# Altium PCB Accelero.PcbDoc
Units mm, origin at the board's own origin, x right, y up, seen from the top; angles counter-clockwise.
Board outline 51.18 x 81.28 mm, 2 copper layers (Top Layer, Bottom Layer); 58 components, 25 nets, 136 pads, 101 vias.
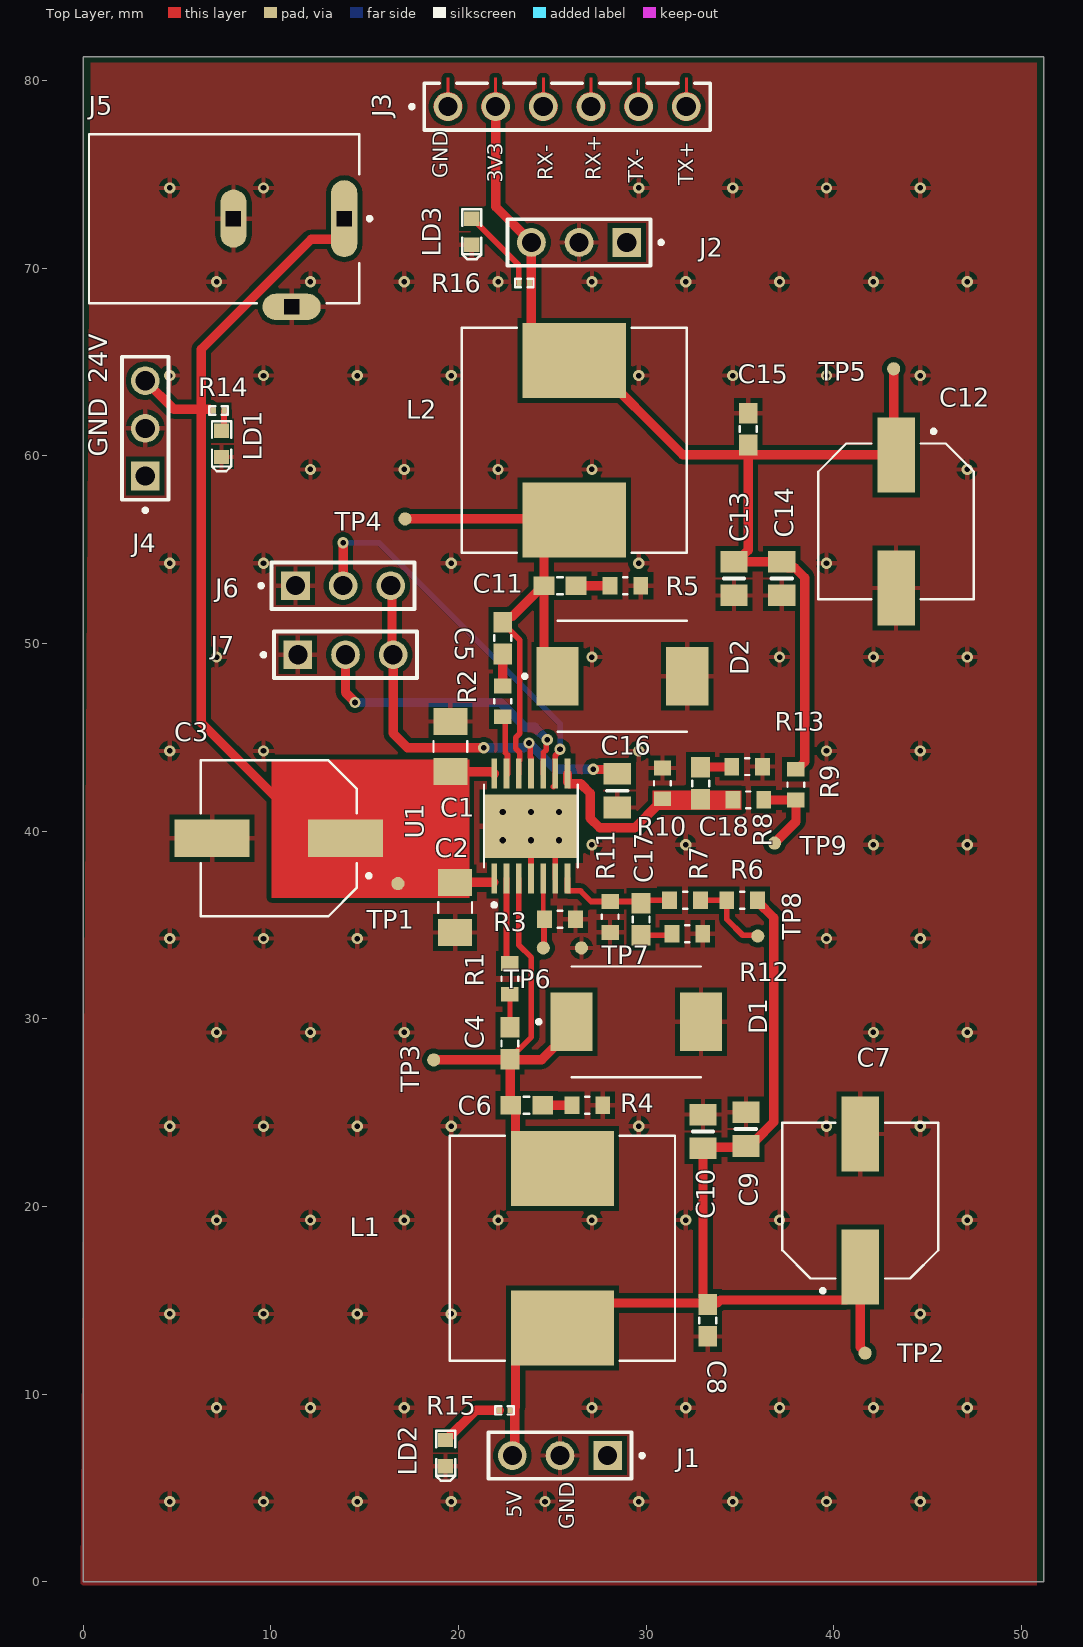
[diagram p0: Top Layer view]
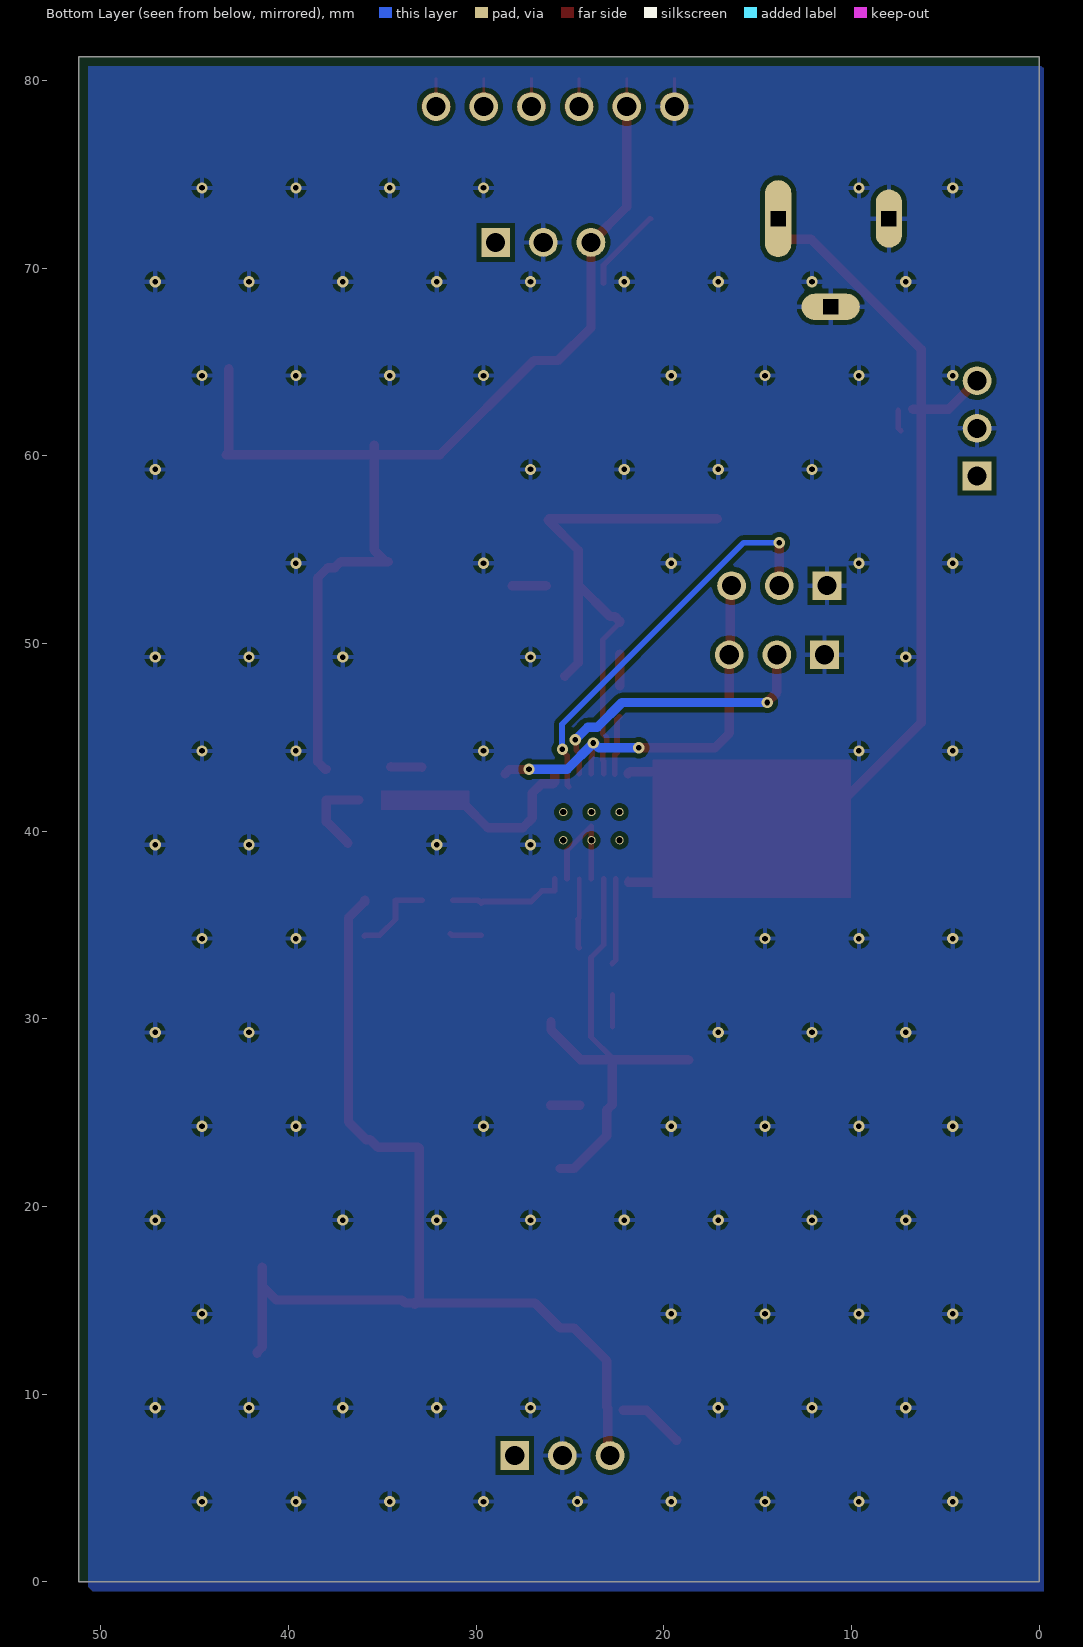
[diagram p1: Bottom Layer view, seen from below]
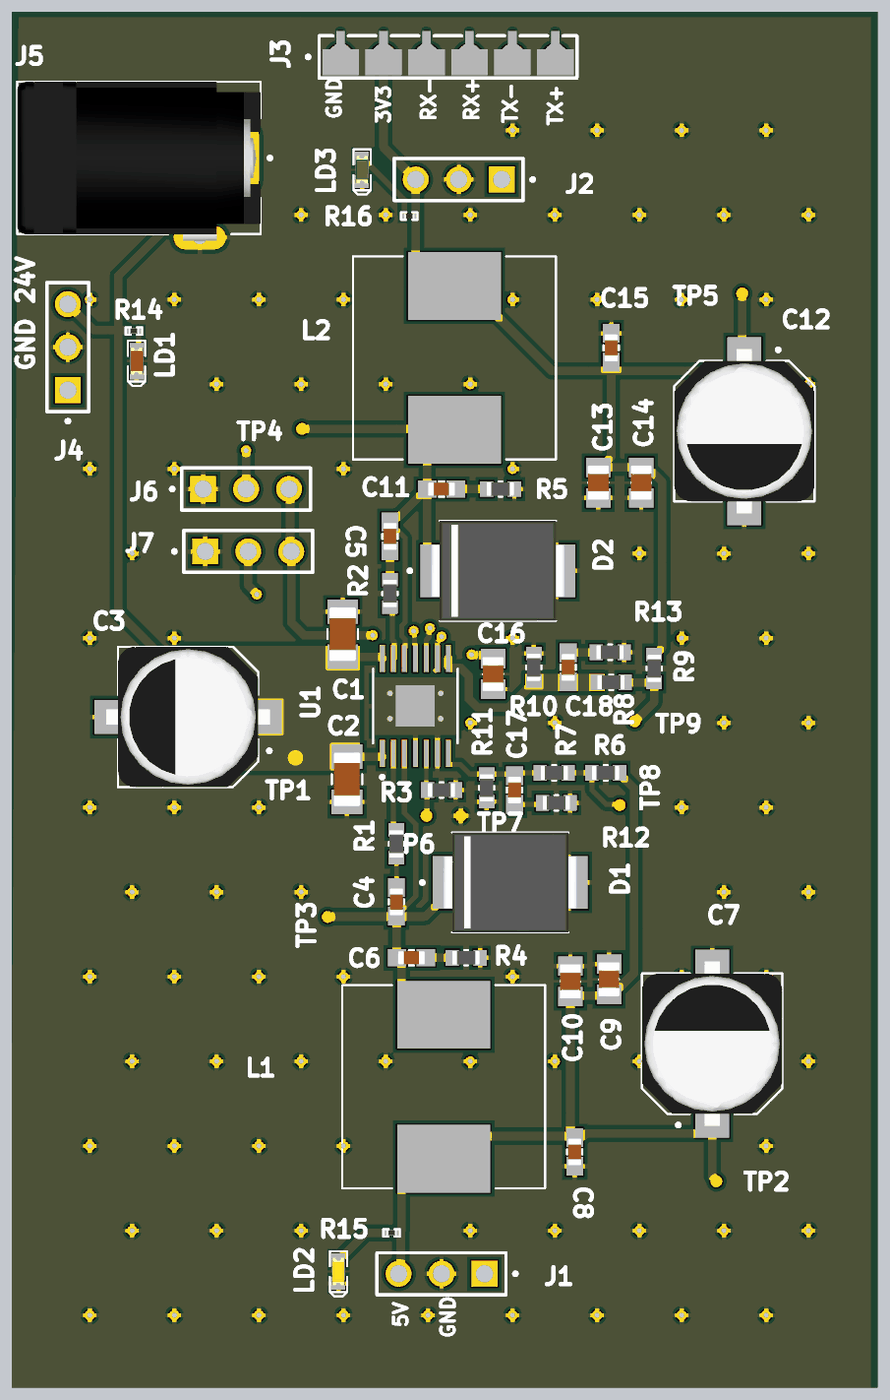
[diagram p2: 3D render of the assembled board from above, using the file's embedded part models]

## Layer stack, top to bottom
Top Solder: solder mask 0.0102, Solder Resist, Dk 3.5
Top Layer: signal copper 0.0356
Dielectric 1: dielectric 0.32, FR-4, Dk 4.8
Bottom Layer: signal copper 0.0356
Bottom Solder: solder mask 0.0102, Solder Resist, Dk 3.5

## Board outline
0,0 51.181,0 51.181,81.28 0,81.28

## Design rules (kind name [scope] priority, off if disabled: settings)
Clearance [All] p1: gap=0.254 ignorepadtopadclearanceinfootprint=FALSE
HoleSize [All] p1: absolutevalues=TRUE maxlimit=0.3 minlimit=0.2 maxpercent=80.000 minpercent=20.000
HoleToHoleClearance [All] p1: gap=0.25 allowstackedmicrovias=TRUE
PolygonConnect [All] p1: connectstyle=Relief reliefconductorwidth=0.254 reliefentries=4 polygonreliefangle="90 Angle" airgapwidth=0.254
RoutingVias [All] p1: holewidth=0.3 width=0.6 viastyle="Through Hole" minholewidth=0.3 minwidth=0.6 maxholewidth=0.3 maxwidth=0.6
SilkToSolderMaskClearance [IsPad] p1: minsilkscreentomaskgap=0.1 clearancetoexposedcopper=TRUE
SolderMaskExpansion [All] p1: expansion=0.102 istentingtop=FALSE
Width [All] p1: maxlimit=0.5 minlimit=0.3 preferedwidth=0.3
27 further rules are at their usual default settings.

## Components (designator, comment, footprint, x,y, rotation, side; value= is the part's Value field where it differs from the comment)
C1 "10 UF" CAPC3216X180N 19.558,44.516 r270 top
C2 "10 UF" CAPC3216X180N 19.812,35.941 r90 top
C3 "100UF" CAP_EEEFC1E101P 10.414,39.624 r180 top
C4 "0.033uF" CAPC1608X90 22.733,28.702 r270 top
C5 "0.033uF" CAPC1608X90 22.352,50.292 r270 top
C6 "470 PF" CAPC1608X90 23.622,25.4 r0 top
C7 "100UF" CAP_EEEFC1E101P 41.402,20.32 r90 top
C8 "0.1UF" CAPC1608X90 33.274,13.931 r270 top
C9 "10UF" CAPC2012X140N 35.306,24.13 r90 top
C10 "10UF" CAPC2012X140N 33.02,24.003 r90 top
C11 "470 PF" CAPC1608X90 25.4,53.086 r0 top
C12 "100UF" CAP_EEEFC1E101P 43.307,56.509 r270 top
C13 "10UF" CAPC2012X140N 34.671,53.467 r270 top
C14 "10UF" CAPC2012X140N 37.211,53.467 r270 top
C15 "0.1UF" CAPC1608X90 35.433,61.429 r90 top
C16 "4.7UF" CAPC2012X140N 28.448,42.164 r270 top
C17 "10NF" CAPC1608X90 29.718,35.306 r270 top
C18 "6.8NF" CAPC1608X90 32.893,42.556 r90 top
D1 "Schottky Diode" DIOM7959X261N 29.464,29.845 r0 top
D2 "Schottky Diode" DIOM7959X261N 28.728,48.26 r0 top
J1 "Header 3" SAMTEC_HMTSW-103-XX-X-S-XXX 25.4,6.731 r0 top
J2 "Header 3" SAMTEC_HMTSW-103-XX-X-S-XXX 26.416,71.374 r0 top
J3 "Header 6" SAMTEC_MTLW-106-06-G-S-180 25.781,78.613 r180 top
J4 "Header 3" SAMTEC_HMTSW-103-XX-X-S-XXX 3.302,61.468 r270 top
J5 "Header 2" TENSILITY_54-00129 8.001,72.644 r270 top
J6 "Header 3" SAMTEC_HMTSW-103-XX-X-S-XXX 13.843,53.086 r180 top
J7 "Header 3" SAMTEC_HMTSW-103-XX-X-S-XXX 13.97,49.403 r180 top
L1 "22UH" IND_MSS1278-223MLB 25.527,17.78 r90 top
L2 "22UH" IND_MSS1278-223MLB 26.162,60.833 r90 top
LD1 "L0603R" LED_0603_R 7.366,60.643 r90 top
LD2 "L0603A" LED_0603_Y 19.304,6.858 r90 top
LD3 "L0603G" LED_0603_G 20.701,71.945 r90 top
R1 "0 ohms" RESC1608X55N 22.733,32.131 r90 top
R2 "0 ohms" RESC1608X55N 22.352,46.921 r90 top
R3 "0 ohms" RESC1608X55N 25.4,35.306 r180 top
R4 "10R" RESC1608X55N 26.855,25.4 r180 top
R5 "10R" RESC1608X55N 28.887,53.086 r180 top
R6 "51R" RESC1608X55N 35.11,36.322 r0 top
R7 "20K" RESC1608X55N 32.062,36.322 r0 top
R8 "20K" RESC1608X55N 35.433,41.667 r180 top
R9 "51R" RESC1608X55N 37.973,42.487 r270 top
R10 "6.34K" RESC1608X55N 30.861,42.556 r270 top
R11 "3.83R" RESC1608X55N 28.067,35.433 r90 top
R12 "845R" RESC1608X55N 32.189,34.544 r180 top
R13 "1.21K" RESC1608X55N 35.375,43.445 r180 top
R14 "10K" RESC0603X03L_C 7.208,62.421 r0 top value=1k
R15 "1k" RESC0603X03L_C 22.448,9.144 r180 top
R16 "330R" RESC0603X03L_C 23.495,69.215 r180 top value=1k
TP1 "Ø0.7mm,SMD" TP_SMD_D0.7mm 16.764,37.211 r90 top
TP2 "Ø0.7mm,SMD" TP_SMD_D0.7mm 41.656,12.192 r90 top
TP3 "Ø0.7mm,SMD" TP_SMD_D0.7mm 18.669,27.813 r90 top
TP4 "Ø0.7mm,SMD" TP_SMD_D0.7mm 17.145,56.642 r90 top
TP5 "Ø0.7mm,SMD" TP_SMD_D0.7mm 43.18,64.643 r90 top
TP6 "Ø0.7mm,SMD" TP_SMD_D0.7mm 24.511,33.782 r90 top
TP7 "Ø0.7mm,SMD" TP_SMD_D0.7mm 26.543,33.782 r90 top
TP8 "Ø0.7mm,SMD" TP_SMD_D0.7mm 35.941,34.417 r90 top
TP9 "Ø0.7mm,SMD" TP_SMD_D0.7mm 36.83,39.37 r90 top
U1 "TPS54383PWPR" IC_TPS27S100BPWPR 23.852,40.271 r90 top

## Footprints (in the part's own frame and the unit in brackets; to place one, negate y for a bottom-side part, rotate by r counter-clockwise, add the part's x,y. Pads: shape width x height; smd on the part's side, far side on the other; paste and mask are expansions set on the pad)
CAP_EEEFC1E101P [mm]
  rect 4x2 smd: 1(-3.55,0) 2(3.55,0)
  silkscreen extent -4.9,-4.15 4.15,4.15, body extent -4.85,-4.15 4.85,4.15, height 10.2
CAPC1608X90 [mm]
  rect 1.1x1 smd: 1(-0.85,0) 2(0.85,0)
  silkscreen extent -0.15,-0.45 0.15,0.45, body extent -0.8,-0.4 0.8,0.4, height 0.95
CAPC2012X140N [mm]
  rect 1.15x1.45 smd paste+0 mask+0.102: 1(-0.9,0) 2(0.9,0)
  silkscreen extent 0,-0.55 0,0.55, body extent -1,-0.63 1,0.63, height 1.4
CAPC3216X180N [mm]
  rect 1.44x1.82 smd: 1(-1.336,0) 2(1.336,0)
  silkscreen extent -0.29,-0.9 0.29,0.9, body extent -1.6,-0.8 1.6,0.8, height 1.8
DIOM7959X261N [mm]
  rect 2.25x3.12 smd: A(3.455,0) C(-3.455,0)
  silkscreen extent -5.3,-2.95 3.44,2.95, body extent -3.98,-2.95 3.98,2.95, height 2.62
IC_TPS27S100BPWPR [mm]
  rect 1.6x0.3 smd paste-0.025: 1(-2.8,1.95) 2(-2.8,1.3) 3(-2.8,0.65) 4(-2.8,0) 5(-2.8,-0.65) 6(-2.8,-1.3) 7(-2.8,-1.95) 8(2.8,-1.95) 9(2.8,-1.3) 10(2.8,-0.65) 11(2.8,0) 12(2.8,0.65) 13(2.8,1.3) 14(2.8,1.95)
  rect 3.4x5 smd paste-3 mask+0: 15(0,0)
  round 0.44 hole 0.33 mask+0: 16(-0.75,1.5) 17(0.75,1.5) 20(-0.75,-1.5) 21(0.75,-1.5)
  round 0.44 hole 0.33: 18(-0.75,0) 19(0.75,0)
  silkscreen extent -4.3,-2.5 2.2,2.5
IND_MSS1278-223MLB [mm]
  rect 4x5.5 smd: 1(-4.25,0) 2(4.25,0)
  silkscreen extent -6,-6 6,6
LED_0603_G [mil]
  rect 30x32 smd: 1(-27.5,0) 2(27.5,0)
  silkscreen extent -58,-20 48,20, body extent -32,-16 32,16, height 24
LED_0603_R [mil]
  rect 30x32 smd: 1(-27.5,0) 2(27.5,0)
  silkscreen extent -58,-20 47,20, body extent -32,-16 32,16, height 24
LED_0603_Y [mil]
  rect 30x32 smd: 1(-27.5,0) 2(27.5,0)
  silkscreen extent -58,-20 47,20, body extent -32,-16 32,16, height 24
RESC0603X03L_C [mm]
  rect 0.27x0.3 smd: 1(-0.285,0) 2(0.285,0)
  silkscreen extent -0.49,-0.22 0.49,0.22, body extent -0.3,-0.15 0.3,0.15, height 0.23
RESC1608X55N [mm]
  rect 0.79x0.93 smd: 1(-0.82,0) 2(0.82,0)
  silkscreen extent -0.11,-0.45 0.11,0.45, body extent -0.8,-0.4 0.8,0.4, height 0.55
SAMTEC_HMTSW-103-XX-X-S-XXX [mm]
  rect 1.53x1.53 / inner round 1.53 / far side rect 1.53x1.53 hole 1.02: 01(2.54,0)
  round 1.53 hole 1.02: 02(0,0) 03(-2.54,0)
  silkscreen extent -3.81,-1.24 4.47,1.24
SAMTEC_MTLW-106-06-G-S-180 [mm]
  round 1.52 hole 1.02: 01(6.35,0) 02(3.81,0) 03(1.27,0) 04(-1.27,0) 05(-3.81,0) 06(-6.35,0)
  Top Layer region: 6.429,0.756 6.508,0.743 6.585,0.723 6.659,0.694 6.73,0.658 6.797,0.615 6.859,0.565 6.915,0.509 6.965,0.447 7.008,0.38 7.044,0.309 7.073,0.235 7.093,0.158 7.106,0.079 7.11,0 7.109,-0.038 7.106,-0.076 7.102,-0.113 7.095,-0.151 7.087,-0.187 7.077,-0.224 7.065,-0.259 7.051,-0.294 7.036,-0.329 7.019,-0.363 7,-0.395 6.98,-0.427 6.958,-0.458 6.935,-0.487 6.91,-0.516 6.884,-0.543 6.856,-0.569 6.827,-0.593 6.798,-0.616 6.767,-0.638 6.735,-0.658 6.702,-0.676 6.668,-0.692 6.633,-0.707 6.598,-0.721 6.562,-0.732 6.526,-0.742 6.489,-0.75 6.452,-0.756 6.415,-0.76 6.415,-1.53 6.285,-1.53 6.285,-0.76 6.248,-0.756 6.211,-0.75 6.174,-0.742 6.138,-0.732 6.102,-0.721 6.067,-0.707 6.032,-0.692 5.998,-0.676 5.965,-0.658 5.933,-0.638 5.902,-0.616 5.873,-0.593 5.844,-0.569 5.816,-0.543 5.79,-0.516 5.765,-0.487 5.742,-0.458 5.72,-0.427 5.7,-0.395 5.681,-0.363 5.664,-0.329 5.649,-0.294 5.635,-0.259 5.623,-0.224 5.613,-0.187 5.605,-0.151 5.598,-0.113 5.594,-0.076 5.591,-0.038 5.59,0 5.594,0.079 5.607,0.158 5.627,0.235 5.656,0.309 5.692,0.38 5.735,0.447 5.785,0.509 5.841,0.565 5.903,0.615 5.97,0.658 6.041,0.694 6.115,0.723 6.192,0.743 6.271,0.756 6.35,0.76
  Top Layer region: 3.889,0.756 3.968,0.743 4.045,0.723 4.119,0.694 4.19,0.658 4.257,0.615 4.319,0.565 4.375,0.509 4.425,0.447 4.468,0.38 4.504,0.309 4.533,0.235 4.553,0.158 4.566,0.079 4.57,0 4.569,-0.038 4.566,-0.076 4.562,-0.113 4.555,-0.151 4.547,-0.187 4.537,-0.224 4.525,-0.259 4.511,-0.294 4.496,-0.329 4.479,-0.363 4.46,-0.395 4.44,-0.427 4.418,-0.458 4.395,-0.487 4.37,-0.516 4.344,-0.543 4.316,-0.569 4.287,-0.593 4.258,-0.616 4.227,-0.638 4.195,-0.658 4.162,-0.676 4.128,-0.692 4.093,-0.707 4.058,-0.721 4.022,-0.732 3.986,-0.742 3.949,-0.75 3.912,-0.756 3.875,-0.76 3.875,-1.53 3.745,-1.53 3.745,-0.76 3.708,-0.756 3.671,-0.75 3.634,-0.742 3.598,-0.732 3.562,-0.721 3.527,-0.707 3.492,-0.692 3.458,-0.676 3.425,-0.658 3.393,-0.638 3.362,-0.616 3.333,-0.593 3.304,-0.569 3.276,-0.543 3.25,-0.516 3.225,-0.487 3.202,-0.458 3.18,-0.427 3.16,-0.395 3.141,-0.363 3.124,-0.329 3.109,-0.294 3.095,-0.259 3.083,-0.224 3.073,-0.187 3.065,-0.151 3.058,-0.113 3.054,-0.076 3.051,-0.038 3.05,0 3.054,0.079 3.067,0.158 3.087,0.235 3.116,0.309 3.152,0.38 3.195,0.447 3.245,0.509 3.301,0.565 3.363,0.615 3.43,0.658 3.501,0.694 3.575,0.723 3.652,0.743 3.731,0.756 3.81,0.76
  Top Layer region: 1.349,0.756 1.428,0.743 1.505,0.723 1.579,0.694 1.65,0.658 1.717,0.615 1.779,0.565 1.835,0.509 1.885,0.447 1.928,0.38 1.964,0.309 1.993,0.235 2.013,0.158 2.026,0.079 2.03,0 2.029,-0.038 2.026,-0.076 2.022,-0.113 2.015,-0.151 2.007,-0.187 1.997,-0.224 1.985,-0.259 1.971,-0.294 1.956,-0.329 1.939,-0.363 1.92,-0.395 1.9,-0.427 1.878,-0.458 1.855,-0.487 1.83,-0.516 1.804,-0.543 1.776,-0.569 1.747,-0.593 1.718,-0.616 1.687,-0.638 1.655,-0.658 1.622,-0.676 1.588,-0.692 1.553,-0.707 1.518,-0.721 1.482,-0.732 1.446,-0.742 1.409,-0.75 1.372,-0.756 1.335,-0.76 1.335,-1.53 1.205,-1.53 1.205,-0.76 1.168,-0.756 1.131,-0.75 1.094,-0.742 1.058,-0.732 1.022,-0.721 0.987,-0.707 0.952,-0.692 0.918,-0.676 0.885,-0.658 0.853,-0.638 0.822,-0.616 0.793,-0.593 0.764,-0.569 0.736,-0.543 0.71,-0.516 0.685,-0.487 0.662,-0.458 0.64,-0.427 0.62,-0.395 0.601,-0.363 0.584,-0.329 0.569,-0.294 0.555,-0.259 0.543,-0.224 0.533,-0.187 0.525,-0.151 0.518,-0.113 0.514,-0.076 0.511,-0.038 0.51,0 0.514,0.079 0.527,0.158 0.547,0.235 0.576,0.309 0.612,0.38 0.655,0.447 0.705,0.509 0.761,0.565 0.823,0.615 0.89,0.658 0.961,0.694 1.035,0.723 1.112,0.743 1.191,0.756 1.27,0.76
  Top Layer region: -1.191,0.756 -1.112,0.743 -1.035,0.723 -0.961,0.694 -0.89,0.658 -0.823,0.615 -0.761,0.565 -0.705,0.509 -0.655,0.447 -0.612,0.38 -0.576,0.309 -0.547,0.235 -0.527,0.158 -0.514,0.079 -0.51,0 -0.511,-0.038 -0.514,-0.076 -0.518,-0.113 -0.525,-0.151 -0.533,-0.187 -0.543,-0.224 -0.555,-0.259 -0.569,-0.294 -0.584,-0.329 -0.601,-0.363 -0.62,-0.395 -0.64,-0.427 -0.662,-0.458 -0.685,-0.487 -0.71,-0.516 -0.736,-0.543 -0.764,-0.569 -0.793,-0.593 -0.822,-0.616 -0.853,-0.638 -0.885,-0.658 -0.918,-0.676 -0.952,-0.692 -0.987,-0.707 -1.022,-0.721 -1.058,-0.732 -1.094,-0.742 -1.131,-0.75 -1.168,-0.756 -1.205,-0.76 -1.205,-1.53 -1.335,-1.53 -1.335,-0.76 -1.372,-0.756 -1.409,-0.75 -1.446,-0.742 -1.482,-0.732 -1.518,-0.721 -1.553,-0.707 -1.588,-0.692 -1.622,-0.676 -1.655,-0.658 -1.687,-0.638 -1.718,-0.616 -1.747,-0.593 -1.776,-0.569 -1.804,-0.543 -1.83,-0.516 -1.855,-0.487 -1.878,-0.458 -1.9,-0.427 -1.92,-0.395 -1.939,-0.363 -1.956,-0.329 -1.971,-0.294 -1.985,-0.259 -1.997,-0.224 -2.007,-0.187 -2.015,-0.151 -2.022,-0.113 -2.026,-0.076 -2.029,-0.038 -2.03,0 -2.026,0.079 -2.013,0.158 -1.993,0.235 -1.964,0.309 -1.928,0.38 -1.885,0.447 -1.835,0.509 -1.779,0.565 -1.717,0.615 -1.65,0.658 -1.579,0.694 -1.505,0.723 -1.428,0.743 -1.349,0.756 -1.27,0.76
  Top Layer region: -3.731,0.756 -3.652,0.743 -3.575,0.723 -3.501,0.694 -3.43,0.658 -3.363,0.615 -3.301,0.565 -3.245,0.509 -3.195,0.447 -3.152,0.38 -3.116,0.309 -3.087,0.235 -3.067,0.158 -3.054,0.079 -3.05,0 -3.051,-0.038 -3.054,-0.076 -3.058,-0.113 -3.065,-0.151 -3.073,-0.187 -3.083,-0.224 -3.095,-0.259 -3.109,-0.294 -3.124,-0.329 -3.141,-0.363 -3.16,-0.395 -3.18,-0.427 -3.202,-0.458 -3.225,-0.487 -3.25,-0.516 -3.276,-0.543 -3.304,-0.569 -3.333,-0.593 -3.362,-0.616 -3.393,-0.638 -3.425,-0.658 -3.458,-0.676 -3.492,-0.692 -3.527,-0.707 -3.562,-0.721 -3.598,-0.732 -3.634,-0.742 -3.671,-0.75 -3.708,-0.756 -3.745,-0.76 -3.745,-1.53 -3.875,-1.53 -3.875,-0.76 -3.912,-0.756 -3.949,-0.75 -3.986,-0.742 -4.022,-0.732 -4.058,-0.721 -4.093,-0.707 -4.128,-0.692 -4.162,-0.676 -4.195,-0.658 -4.227,-0.638 -4.258,-0.616 -4.287,-0.593 -4.316,-0.569 -4.344,-0.543 -4.37,-0.516 -4.395,-0.487 -4.418,-0.458 -4.44,-0.427 -4.46,-0.395 -4.479,-0.363 -4.496,-0.329 -4.511,-0.294 -4.525,-0.259 -4.537,-0.224 -4.547,-0.187 -4.555,-0.151 -4.562,-0.113 -4.566,-0.076 -4.569,-0.038 -4.57,0 -4.566,0.079 -4.553,0.158 -4.533,0.235 -4.504,0.309 -4.468,0.38 -4.425,0.447 -4.375,0.509 -4.319,0.565 -4.257,0.615 -4.19,0.658 -4.119,0.694 -4.045,0.723 -3.968,0.743 -3.889,0.756 -3.81,0.76
  Top Layer region: -6.271,0.756 -6.192,0.743 -6.115,0.723 -6.041,0.694 -5.97,0.658 -5.903,0.615 -5.841,0.565 -5.785,0.509 -5.735,0.447 -5.692,0.38 -5.656,0.309 -5.627,0.235 -5.607,0.158 -5.594,0.079 -5.59,0 -5.591,-0.038 -5.594,-0.076 -5.598,-0.113 -5.605,-0.151 -5.613,-0.187 -5.623,-0.224 -5.635,-0.259 -5.649,-0.294 -5.664,-0.329 -5.681,-0.363 -5.7,-0.395 -5.72,-0.427 -5.742,-0.458 -5.765,-0.487 -5.79,-0.516 -5.816,-0.543 -5.844,-0.569 -5.873,-0.593 -5.902,-0.616 -5.933,-0.638 -5.965,-0.658 -5.998,-0.676 -6.032,-0.692 -6.067,-0.707 -6.102,-0.721 -6.138,-0.732 -6.174,-0.742 -6.211,-0.75 -6.248,-0.756 -6.285,-0.76 -6.285,-1.53 -6.415,-1.53 -6.415,-0.76 -6.452,-0.756 -6.489,-0.75 -6.526,-0.742 -6.562,-0.732 -6.598,-0.721 -6.633,-0.707 -6.668,-0.692 -6.702,-0.676 -6.735,-0.658 -6.767,-0.638 -6.798,-0.616 -6.827,-0.593 -6.856,-0.569 -6.884,-0.543 -6.91,-0.516 -6.935,-0.487 -6.958,-0.458 -6.98,-0.427 -7,-0.395 -7.019,-0.363 -7.036,-0.329 -7.051,-0.294 -7.065,-0.259 -7.077,-0.224 -7.087,-0.187 -7.095,-0.151 -7.102,-0.113 -7.106,-0.076 -7.109,-0.038 -7.11,0 -7.106,0.079 -7.093,0.158 -7.073,0.235 -7.044,0.309 -7.008,0.38 -6.965,0.447 -6.915,0.509 -6.859,0.565 -6.797,0.615 -6.73,0.658 -6.659,0.694 -6.585,0.723 -6.508,0.743 -6.429,0.756 -6.35,0.76
  silkscreen extent -7.62,-1.24 8.37,1.24
TENSILITY_54-00129 [mm]
  oval 4.1x1.4 hole 0.8 square mask+0.05: A(0,5.9)
  oval 3.1x1.4 hole 0.8 square mask+0.05: B(0,0)
  oval 1.4x3.1 hole 0.8 square mask+0.05: C(4.7,3.1)
  silkscreen extent -4.5,-7.7 4.5,7.35, body extent -4.5,-7.7 4.88,6.7, height 10.8
TP_SMD_D0.7mm [mm]
  round 0.7 smd paste-5: 1(0,0)

## Part data
C1 C2: library part C3216X5R1E106M160AB, "CAP CER 10UF 16V X5R 1206", Package="3216 TDK", Check_prices=https://www.snapeda.com/parts/C3216X5R1E106M160AB/TDK/view-part/?ref=eda, Digi-Key_Part_Number=445-7708-2-ND, MF=TDK, MP=C3216X5R1E106M160AB, Purchase-URL=https://pricing.snapeda.com/search/part/C3216X5R1E106M160AB/?ref=eda, SnapEDA_Link=https://www.snapeda.com/parts/C3216X5R1E106M160AB/TDK/view-part/?ref=snap
C3: library part EEEFC1E101P, "Capacitor, aluminum, 25 V, ±20%, 100 μF, 0.328 x 0.390 / inch", Package="RADIAL-2 Panasonic", Check_prices=https://www.snapeda.com/parts/EEE-FC1E101P/Panasonic+Electronic+Components/view-part/?ref=eda, MF=Panasonic, MP=EEE-FC1E101P, SnapEDA_Link=https://www.snapeda.com/parts/EEE-FC1E101P/Panasonic+Electronic+Components/view-part/?ref=snap
C4 C5: library part C0603C104J3RACTU, "Capacitor, ceramic, 25 V, X7R, 20%, .033 μF, 0603", Package="603-2 KEMET", Check_prices=https://www.snapeda.com/parts/C0603C104J3RACTU/KEMET/view-part/?ref=eda, MF=KEMET, MP=C0603C104J3RACTU, SnapEDA_Link=https://www.snapeda.com/parts/C0603C104J3RACTU/KEMET/view-part/?ref=snap
C6 C11: library part C0603C104J3RACTU, "Capacitor, ceramic, 25 V, X7R, 20%, 470 pF, 0603", Package="603-2 KEMET", Check_prices=https://www.snapeda.com/parts/C0603C104J3RACTU/KEMET/view-part/?ref=eda, MF=KEMET, MP=C0603C104J3RACTU, SnapEDA_Link=https://www.snapeda.com/parts/C0603C104J3RACTU/KEMET/view-part/?ref=snap
C7 C12: library part EEEFC1E101P, "Capacitor, aluminum, 10 V, 20%, FC series, 100 μF, / 0.335 x 0.374", Package="RADIAL-2 Panasonic", Check_prices=https://www.snapeda.com/parts/EEE-FC1E101P/Panasonic+Electronic+Components/view-part/?ref=eda, MF=Panasonic, MP=EEE-FC1E101P, SnapEDA_Link=https://www.snapeda.com/parts/EEE-FC1E101P/Panasonic+Electronic+Components/view-part/?ref=snap
C8 C15: library part C0603C104J3RACTU, "Capacitor, ceramic, 10 V, X7R, 20%, 0.1 μF, 0603", Package="603-2 KEMET", Check_prices=https://www.snapeda.com/parts/C0603C104J3RACTU/KEMET/view-part/?ref=eda, MF=KEMET, MP=C0603C104J3RACTU, SnapEDA_Link=https://www.snapeda.com/parts/C0603C104J3RACTU/KEMET/view-part/?ref=snap
C9 C10 C13 C14: library part 0805ZD474MAT2A, "Capacitor, ceramic, 6.3 V, X5R, 20%, 10 μF, 0805", Package="0805-2 AVX", Check_prices=https://www.snapeda.com/parts/0805ZD474MAT2A/AVX/view-part/?ref=eda, MF=AVX, MP=0805ZD474MAT2A, SnapEDA_Link=https://www.snapeda.com/parts/0805ZD474MAT2A/AVX/view-part/?ref=snap
C16: library part 0805ZD474MAT2A, "Capacitor, ceramic, 10 V, X5R, 20%, 4.7 μF, 0805", Package="0805-2 AVX", Check_prices=https://www.snapeda.com/parts/0805ZD474MAT2A/AVX/view-part/?ref=eda, MF=AVX, MP=0805ZD474MAT2A, SnapEDA_Link=https://www.snapeda.com/parts/0805ZD474MAT2A/AVX/view-part/?ref=snap
C17: library part C0603C104J3RACTU, "Capacitor, ceramic, 25 V, X7R, 20%, 10 nF, 0603", Package="603-2 KEMET", Check_prices=https://www.snapeda.com/parts/C0603C104J3RACTU/KEMET/view-part/?ref=eda, MF=KEMET, MP=C0603C104J3RACTU, SnapEDA_Link=https://www.snapeda.com/parts/C0603C104J3RACTU/KEMET/view-part/?ref=snap
C18: library part C0603C104J3RACTU, "Capacitor, ceramic, 25 V, X7R, 20%, 6.8 nF, 0603", Package="603-2 KEMET", Check_prices=https://www.snapeda.com/parts/C0603C104J3RACTU/KEMET/view-part/?ref=eda, MF=KEMET, MP=C0603C104J3RACTU, SnapEDA_Link=https://www.snapeda.com/parts/C0603C104J3RACTU/KEMET/view-part/?ref=snap
D1 D2: library part MBRS330T3G, "Diode Schottky 30 V 3A Surface Mount SMC", Package="SMC-2 ON Semiconductor", Check_prices=https://www.snapeda.com/parts/MBRS330T3G/Onsemi/view-part/?ref=eda, MF="ON Semiconductor", MP=MBRS330T3G, SnapEDA_Link=https://www.snapeda.com/parts/MBRS330T3G/Onsemi/view-part/?ref=snap
J1 J2 J4 J6 J7: library part HMTSW-103-XX-X-S-XXX, "Connector Unshrouded Header 3 Position 2.54mm Solder Straight Through Hole", Package=None, Check_prices=https://www.snapeda.com/parts/HMTSW-103-10-T-S-330/Samtec/view-part/?ref=eda, MF=Samtec, MP=HMTSW-103-10-T-S-330, SnapEDA_Link=https://www.snapeda.com/parts/HMTSW-103-10-T-S-330/Samtec/view-part/?ref=snap
J3: library part MTLW-106-06-G-S-180, Package=None, Availability=Unavailable, MP=MTLW-106-06-G-S-180, Price=None
J5: library part 54-00129, "Connector, dc jack 5.5x2.1 mm, PCB mount, 90 degrees, silver plated, thru hole", Package=None, Availability="In Stock", Check_prices=https://www.snapeda.com/parts/54-00129/Tensility+International+Corp/view-part/?ref=eda, MF="Tensility International Corp", MP=54-00129, Price=None, Purchase-URL=https://pricing.snapeda.com/search?q=54-00129&ref=eda, SnapEDA_Link=https://www.snapeda.com/parts/54-00129/Tensility+International+Corp/view-part/?ref=snap
L1 L2: library part MSS1278-223MLB, "Inductor, Power, 6.8 A, 0.038 Ω, 22 μH, 0.484 x 0.484 / inch", Package=None, Check_prices=https://www.snapeda.com/parts/MSS1278-223MLB/Coilcraft/view-part/?ref=eda, MF=Coilcraft, MP=MSS1278-223MLB, SnapEDA_Link=https://www.snapeda.com/parts/MSS1278-223MLB/Coilcraft/view-part/?ref=snap
LD1: library part ASMT-RR45-AQ902, "LED, Red, 0603, Vf=2V, - 40 to +100°C", Manufacturer=Avago, Part number IPS=N.A., Part number NEMS=101400008, Supplier Part Number 1=516-2005-1-ND, Artikkelnr Noca=N.A., Author=rsk, Component Class=Optoelectronics, Component Status=Active, ComponentLink1Description=Datasheet, ComponentLink1URL=N.A., ComponentLink2Description="Supplier link", ComponentLink2URL=N.A., Footprint Doc=0603, HelpURL=http://www.avagotech.com/docs/AV02-0378EN, LatestRevisionDate=2015-06-12, Manufacturer Part Number=ASMT-RR45-AQ902, Note="90 mcd @ 20 mA", Pad Count=2, Part Number=ASMT-RR45-AQ902, Part number Norautron=N.A., PartId=101400008, Published=2015-06-12, Supplier 1=Digi-Key, Supplier 2=Mouser, Supplier Part Number 2=630-ASMT-RR45-AQ902
LD2: library part ASMT-RA45-AP932, "LED, Amber, 0603,  Vf=2V, - 40 to +100°C", Manufacturer=Avago, Part number IPS=N.A., Part number NEMS=101400011, Artikkelnr Noca=N.A., Author=rsk, Component Class=Optoelectronics, Component Status=Active, ComponentLink1Description=Datasheet, ComponentLink1URL=N.A., ComponentLink2Description="Supplier link", ComponentLink2URL=N.A., Footprint Doc=0603, HelpURL=http://www.avagotech.com/docs/AV02-0378EN, LatestRevisionDate=2015-06-12, Manufacturer Part Number=ASMT-RA45-AP932, Note="57 mcd @ 20 mA", Pad Count=2, Part Number=ASMT-RA45-AP932, Part number Norautron=N.A., PartId=101400011, Published=2015-06-12, Supplier 1=N.A., Supplier 2=Mouser, Supplier Part Number 1=N.A., Supplier Part Number 2=630-ASMT-RA45-AP932
LD3: library part ASMT-RF45-AN002, "LED, Yellow Green, 0603, Vf=2V, - 40 to +100°C", Manufacturer=Avago, Part number IPS=N.A., Part number NEMS=101400010, Supplier Part Number 1=516-2522-1-ND, Artikkelnr Noca=N.A., Author=rsk, Component Class=Optoelectronics, Component Status=Active, ComponentLink1Description=Datasheet, ComponentLink1URL=N.A., ComponentLink2Description="Supplier link", ComponentLink2URL=N.A., Footprint Doc=0603, HelpURL=http://www.avagotech.com/docs/AV02-0378EN, LatestRevisionDate=2015-06-12, Manufacturer Part Number=ASMT-RF45-AN002, Note="28 mcd @ 20 mA", Pad Count=2, Part Number=ASMT-RF45-AN002, Part number Norautron=N.A., PartId=101400010, Published=2015-06-12, Supplier 1=Digi-Key, Supplier 2=Mouser, Supplier Part Number 2=630-ASMT-RF45-AN002
R1 R2 R3: library part RC0603JR-0751RL, "Resistor, chip, 1/16 W, 5%, 0 Ω, 0603", Package="1608 Yageo", Check_prices=https://www.snapeda.com/parts/RC0603JR-0751RL/Yageo/view-part/?ref=eda, MF=Yageo, MP=RC0603JR-0751RL, SnapEDA_Link=https://www.snapeda.com/parts/RC0603JR-0751RL/Yageo/view-part/?ref=snap
R4 R5: library part RC0603JR-0751RL, "Resistor, chip, 1/16 W, 5%, 10 Ω, 0603", Package="1608 Yageo", Check_prices=https://www.snapeda.com/parts/RC0603JR-0751RL/Yageo/view-part/?ref=eda, MF=Yageo, MP=RC0603JR-0751RL, SnapEDA_Link=https://www.snapeda.com/parts/RC0603JR-0751RL/Yageo/view-part/?ref=snap
R6 R9: library part RC0603JR-0751RL, "Resistor, chip, 1/16 W, 5%, 51 Ω, 0603", Package="1608 Yageo", Check_prices=https://www.snapeda.com/parts/RC0603JR-0751RL/Yageo/view-part/?ref=eda, MF=Yageo, MP=RC0603JR-0751RL, SnapEDA_Link=https://www.snapeda.com/parts/RC0603JR-0751RL/Yageo/view-part/?ref=snap
R7 R8: library part RC0603JR-0751RL, "Resistor, chip, 1/16 W, 1%, 20 kΩ, 0603", Package="1608 Yageo", Check_prices=https://www.snapeda.com/parts/RC0603JR-0751RL/Yageo/view-part/?ref=eda, MF=Yageo, MP=RC0603JR-0751RL, SnapEDA_Link=https://www.snapeda.com/parts/RC0603JR-0751RL/Yageo/view-part/?ref=snap
R10: library part RC0603JR-0751RL, "Resistor, chip, 1/16 W, 1%, 6.34 kΩ, 0603", Package="1608 Yageo", Check_prices=https://www.snapeda.com/parts/RC0603JR-0751RL/Yageo/view-part/?ref=eda, MF=Yageo, MP=RC0603JR-0751RL, SnapEDA_Link=https://www.snapeda.com/parts/RC0603JR-0751RL/Yageo/view-part/?ref=snap
R11: library part RC0603JR-0751RL, "Resistor, chip, 1/16 W, 1%, 3.83 kΩ, 0603", Package="1608 Yageo", Check_prices=https://www.snapeda.com/parts/RC0603JR-0751RL/Yageo/view-part/?ref=eda, MF=Yageo, MP=RC0603JR-0751RL, SnapEDA_Link=https://www.snapeda.com/parts/RC0603JR-0751RL/Yageo/view-part/?ref=snap
R12: library part RC0603JR-0751RL, "Resistor, chip, 1/16 W, 1%, 845 Ω, 0603", Package="1608 Yageo", Check_prices=https://www.snapeda.com/parts/RC0603JR-0751RL/Yageo/view-part/?ref=eda, MF=Yageo, MP=RC0603JR-0751RL, SnapEDA_Link=https://www.snapeda.com/parts/RC0603JR-0751RL/Yageo/view-part/?ref=snap
R13: library part RC0603JR-0751RL, "Resistor, chip, 1/16 W, 1%, 1.21 kΩ, 0603", Package="1608 Yageo", Check_prices=https://www.snapeda.com/parts/RC0603JR-0751RL/Yageo/view-part/?ref=eda, MF=Yageo, MP=RC0603JR-0751RL, SnapEDA_Link=https://www.snapeda.com/parts/RC0603JR-0751RL/Yageo/view-part/?ref=snap
R14 R15 R16: library part R0201-1k0, "Resistor, ±1%, 0.05W", Manufacturer=N.A., Part number IPS=00000005786, Part number NEMS=100100043, Artikkelnr Noca=N.A., Author=rsk, Component Class=Resistors, Component Status=Active, ComponentLink1Description=Datasheet, ComponentLink1URL=N.A., ComponentLink2Description="Supplier link", ComponentLink2URL=N.A., Footprint Doc=0201, HelpURL=N.A., LatestRevisionDate=2014-11-13, Manufacturer Part Number=N.A., Note="Chip Res 1%", Pad Count=2, Part Number=R0201-1k0, Part number Norautron=N.A., PartId=100100043, Published=2014-11-13, Supplier 1=N.A., Supplier 2=N.A., Supplier Part Number 1=N.A., Supplier Part Number 2=N.A.
TP1 TP2 TP3 TP4 TP5 TP6 TP7 TP8 TP9: library part TP_SMD_Ø0.7MM, "0.7mm circular SMD testpad", Manufacturer="Nordic Semiconductor", Manufacturer Part Number=N.A., Part number NEMS=100500474, Artikkelnr Noca=N.A., Author=rsk, Component Class=Connectors, Component Status=Active, ComponentLink1Description=Datasheet, ComponentLink1URL=N.A., ComponentLink2Description="Supplier link", ComponentLink2URL=N.A., Footprint Doc=TP_SMD_Ø0.7mm, HelpURL=N.A., LatestRevisionDate=2021-03-05, Note=N.A., Pad Count=1, Part Number=TP_SMD_Ø0.7MM, Part number IPS=N.A., Part number Norautron=N.A., PartId=100500474, Published=2017-12-14, Supplier 1=N.A., Supplier 2=N.A., Supplier Part Number 1=N.A., Supplier Part Number 2=N.A., System=Connector
U1: Package=None, Availability=Unavailable, MF="{'manufacturer': u'Texas Instruments'}", MP=TPS54383PWPR, Price=None

## Via types
v1: diameter 0.6, hole 0.3, Top Layer to Bottom Layer, 101 vias

## Nets (pads, with @x,y where several pads share a name; then routed paths per layer and width w, separated by ;. In a path a pad name is that pad's centre, name@x,y a point inside that pad or via, vN(x,y) a via of type N, cw(c..) or ccw(c..) an arc to the next point about the centre after c; other vN are vias at no path point)
3V3: C12.1 C13.1 C14.1 C15.1 J2.03 J3.02 L2.2 R9.1 R16.1 TP5.1 | length 60.5
  Top Layer w0.5: J3.02 21.971,73.279 J2.03 23.876,66.833 25.626,65.083 L2.2 26.912,65.083 31.936,60.059 C15.1@35.433,60.059 ; C13.1 C13.1@34.821,54.367 ; C15.1 C15.1@35.433,60.059 ; R9.1 38.043,43.307 38.44,43.704 38.44,53.508 37.906,54.042 37.536,54.042 C14.1 C13.1@34.821,54.367 ; TP5.1 43.18,60.186 C12.1 C15.1@35.433,60.059 ; C13.1@34.821,54.367 35.433,54.979 C15.1@35.433,60.059
+5V: C7.1 C8.1 C9.1 C10.1 J1.03 L1.1 R6.2 R15.1 TP2.1 | length 54.8
  Top Layer w0.5: J1.03 22.987,6.858 22.987,9.271 23.027,9.311 23.027,11.78 24.777,13.53 L1.1 26.856,14.859 C8.1@33.246,14.859 ; C8.1 33.274,14.831 C8.1@33.246,14.859 ; C8.1@33.274,14.859 33.782,14.859 33.943,15.02 40.652,15.02 C7.1@41.402,15.77 ; R6.2 35.93,36.252 36.795,35.387 36.795,24.506 35.844,23.555 35.631,23.555 C9.1 35.242,23.166 33.084,23.166 C10.1 33.02,15.085 C8.1@33.246,14.859 ; C7.1 C7.1@41.402,15.77 ; TP2.1 41.656,12.246 41.402,12.5 C7.1@41.402,15.77
+24V: C1.2 C2.2 C3.1 J4.03 J5.A R14.1 TP1.1 U1.1 U1.14 | length 61.7
  Top Layer w0.254: U1.1@21.879,37.277 21.902,37.3 U1.1
  Top Layer w0.5: J4.03 4.826,62.484 6.284,62.484 ; 6.731,62.484 6.284,62.484 ; J5.A 13.901,71.96 13.485,71.544 12.148,71.544 6.284,65.68 6.284,62.484 ; U1.1@21.879,37.277 C2.2 19.558,37.531 19.558,40.355 ; U1.14 21.902,43.08 21.802,43.18 C1.2 19.558,40.355 ; 6.284,62.484 6.284,45.786 11.696,40.374 13.214,40.374 C3.1 14.696,40.355 19.558,40.355
GND: C1.1 C2.1 C3.2 C7.2 C8.2 C9.2 C10.2 C12.2 C13.2 C14.2 C15.2 C16.2 D1.A D2.A J1.02 J2.02 J3.01 J4.02 J5.B J5.C J6.01 J7.01 LD1.1 LD2.1 LD3.1 R3.1 R4.1 R5.1 R10.1 R11.1 R12.1 R13.1 TP7.1 U1.4 U1.6 U1.15 | length 6.2
  Top Layer w0.3: U1.4 U1.15 25.152,38.971 U1.6 ; J2.02@26.352,71.438 J2.02
  other v1: 4.6,4.28 9.6,4.28 14.6,4.28 19.6,4.28 24.6,4.28 29.6,4.28 34.6,4.28 39.6,4.28 44.6,4.28 7.1,9.28 12.1,9.28 17.1,9.28 27.1,9.28 32.1,9.28 37.1,9.28 42.1,9.28 47.1,9.28 4.6,14.28 9.6,14.28 14.6,14.28 19.6,14.28 44.6,14.28 7.1,19.28 12.1,19.28 17.1,19.28 22.1,19.28 27.1,19.28 32.1,19.28 37.1,19.28 47.1,19.28 4.6,24.28 9.6,24.28 14.6,24.28 19.6,24.28 29.6,24.28 39.6,24.28 44.6,24.28 7.1,29.28 12.1,29.28 17.1,29.28 42.1,29.28 47.1,29.28 4.6,34.28 9.6,34.28 14.6,34.28 39.6,34.28 44.6,34.28 27.1,39.28 32.1,39.28 42.1,39.28 47.1,39.28 4.6,44.28 9.6,44.28 29.6,44.28 39.6,44.28 44.6,44.28 7.1,49.28 27.1,49.28 37.1,49.28 42.1,49.28 47.1,49.28 4.6,54.28 9.6,54.28 19.6,54.28 29.6,54.28 39.6,54.28 12.1,59.28 17.1,59.28 22.1,59.28 27.1,59.28 47.1,59.28 4.6,64.28 9.6,64.28 14.6,64.28 19.6,64.28 29.6,64.28 34.6,64.28 39.6,64.28 44.6,64.28 7.1,69.28 12.1,69.28 17.1,69.28 22.1,69.28 27.1,69.28 32.1,69.28 37.1,69.28 42.1,69.28 47.1,69.28 4.6,74.28 9.6,74.28 29.6,74.28 34.6,74.28 39.6,74.28 44.6,74.28
NetC4_1: C4.1 R1.1 | length 1.8
  Top Layer w0.254: C4.1 R1.1
NetC4_2: C4.2 C6.1 D1.C L1.2 TP3.1 U1.3 | length 26.2
  Top Layer w0.3: C4.2@22.733,27.902 23.876,29.045 23.876,33.274 23.202,33.948 U1.3
  Top Layer w0.5: TP3.1 18.688,27.832 C4.2@22.733,27.832 ; C4.2 C4.2@22.752,27.832 ; L1.2 24.777,22.03 23.027,23.78 23.027,25.15 22.777,25.4 C6.1 22.752,25.419 C4.2@22.752,27.832 ; D1.C 26.009,29.41 24.431,27.832 C4.2@22.752,27.832
NetC5_1: C5.1 C11.1 D2.C L2.1 TP4.1 U1.12 | length 30
  Top Layer w0.3: C5.1 22.352,51.092 23.256,50.188 23.256,45.207 23.045,44.996 23.045,44.412 23.256,44.201 23.256,43.775 23.202,43.721 U1.12
  Top Layer w0.5: TP4.1 26.103,56.642 L2.1 24.55,54.971 C11.1 ; C5.1 22.352,51.192 22.602,51.442 22.856,51.442 24.5,53.086 C11.1 ; D2.C 24.55,48.983 C11.1
NetC5_2: C5.2 R2.2 | length 1.7
  Top Layer w0.5: R2.2 C5.2
NetC6_2: C6.2 R4.2 | length 1.6
  Top Layer w0.5: C6.2 R4.2
NetC11_2: C11.2 R5.2 | length 1.8
  Top Layer w0.5: C11.2 R5.2
NetC17_1: C17.1 R7.1 R11.2 U1.7 | length 6.4
  Top Layer w0.3: U1.7 25.802,36.821 26.493,36.821 27.061,36.253 R11.2 29.621,36.253 C17.1 29.884,36.322 R7.1
NetC17_2: C17.2 R12.2 | length 1.7
  Top Layer w0.3: C17.2 31.281,34.456 R12.2
NetC18_1: C18.1 R8.2 R10.2 U1.8 | length 11.8
  Top Layer w0.5: U1.8 25.802,42.621 25.902,42.521 26.515,42.521 27.015,42.021 27.015,40.685 27.514,40.185 29.382,40.185 30.646,41.449 30.646,41.591 30.791,41.736 R10.2 30.876,41.721 32.878,41.721 C18.1 32.912,41.686 34.593,41.686 R8.2
NetC18_2: C18.2 R13.2 | length 1.7
  Top Layer w0.5: C18.2 32.912,43.425 34.535,43.425 R13.2
NetLD1_2: LD1.2 R14.2 | length 1.1
  Top Layer w0.3: LD1.2 7.493,61.468 R14.2
NetLD2_2: LD2.2 R15.2 | length 3.5
  Top Layer w0.5: LD2.2 19.329,7.556 20.917,9.144 R15.2
NetLD3_2: LD3.2 R16.2 | length 4.5
  Top Layer w0.3: LD3.2 20.726,72.644 23.21,70.16 R16.2
NetR1_2: R1.2 U1.2 | length 4.6
  Top Layer w0.3: U1.2 22.552,33.132 R1.2
NetR2_1: R2.1 U1.13 | length 3.2
  Top Layer w0.3: R2.1 22.491,45.962 22.491,44.183 22.606,44.068 U1.13@22.606,43.053
NetR3_2: R3.2 TP6.1 U1.5 | length 3.7
  Top Layer w0.254: U1.5 24.502,35.384 R3.2
  Top Layer w0.3: TP6.1 24.546,33.817 24.546,35.272 R3.2
NetR6_1: R6.1 R7.2 TP8.1 | length 4.4
  Top Layer w0.3: R7.2 R6.1 34.29,35.306 35.141,34.455 35.903,34.455 TP8.1
NetR8_1: R8.1 R9.2 TP9.1 | length 4.5
  Top Layer w0.5: R8.1 R9.2 37.973,40.513 TP9.1
"TPS BP": C16.1 J6.03 J7.03 U1.11 | length 22.3
  Top Layer w0.3: v1@23.81,44.431 23.81,43.942 23.852,43.9 U1.11
  Top Layer w0.5: J6.03 16.447,53.023 16.447,49.466 J7.03 16.51,45.212 17.272,44.45 v1(21.336,44.45) ; v1(27.178,43.307) 27.197,43.288 28.224,43.288 C16.1
  Bottom Layer w0.5: v1(21.336,44.45) 23.468,44.45 23.722,44.704 v1(23.749,44.704) 25.146,43.307 v1(27.178,43.307)
"TPS ILIM2": J6.02 U1.9 | length 21.5
  Top Layer w0.3: U1.9@25.056,42.375 25.146,42.465 25.146,44.029 25.399,44.283 v1(25.399,44.364)
  Top Layer w0.5: v1(13.843,55.372) J6.02 J6.02@13.961,53.204
  Bottom Layer w0.3: v1(13.843,55.372) 15.75,55.372 25.419,45.703 25.419,44.384 v1(25.399,44.364)
"TPS Sequance": J7.02 U1.10 | length 15.7
  Top Layer w0.3: U1.10 24.502,44.175 24.658,44.331 24.658,44.818 v1(24.715,44.875)
  Top Layer w0.5: J7.02 13.97,47.398 14.478,46.89 v1(14.478,46.863) ; v1@24.715,44.848 v1(24.715,44.875)
  Bottom Layer w0.5: v1(14.478,46.863) 22.225,46.863 23.545,45.543 24.047,45.543 v1(24.715,44.875)
pads on no net: J1.01 J2.01 J3.03 J3.04 J3.05 J3.06 J4.01 U1.16 U1.17 U1.18 U1.19 U1.20 U1.21

## Polygon pours and split planes (outlines as drawn)
GND on Top Layer "GND_L01_P000" (solid, pour order 0): 0.383,80.963 50.802,80.963 50.802,-0.19 -0.129,-0.19
GND on Bottom Layer "GND_L02_P001" (solid, pour order 1): -0.254,80.645 -0.127,80.772 50.673,80.772 50.673,-0.254 50.419,-0.508 -0.254,-0.508

## Other copper
Top Layer:
  region net NetC18_1: 30.353,42.164 35.052,42.164 35.052,41.148 30.353,41.148
  region net +24V: 10.033,43.815 10.033,36.449 20.574,36.449 20.574,43.815

## Silkscreen, mask and mechanical layers (free items; w line width, h text height)
Top Overlay:
  text "GND" at 19.431,74.803 h0.8 r90
  text "RX-" at 25.019,74.676 h0.8 r90
  text "RX+" at 27.559,74.676 h0.8 r90
  text "3V3" at 22.352,74.549 h0.8 r90
  text "TX-" at 29.845,74.549 h0.8 r90
  text "TX+" at 32.512,74.422 h0.8 r90
  text "24V" at 1.27,63.881 h1 r90
  text "GND" at 1.27,59.944 h1 r90
  text "5V" at 23.368,3.429 h0.8 r90
  text "GND" at 26.162,2.794 h0.8 r90